# EAGLE board test_parts (EAGLE 6.3)
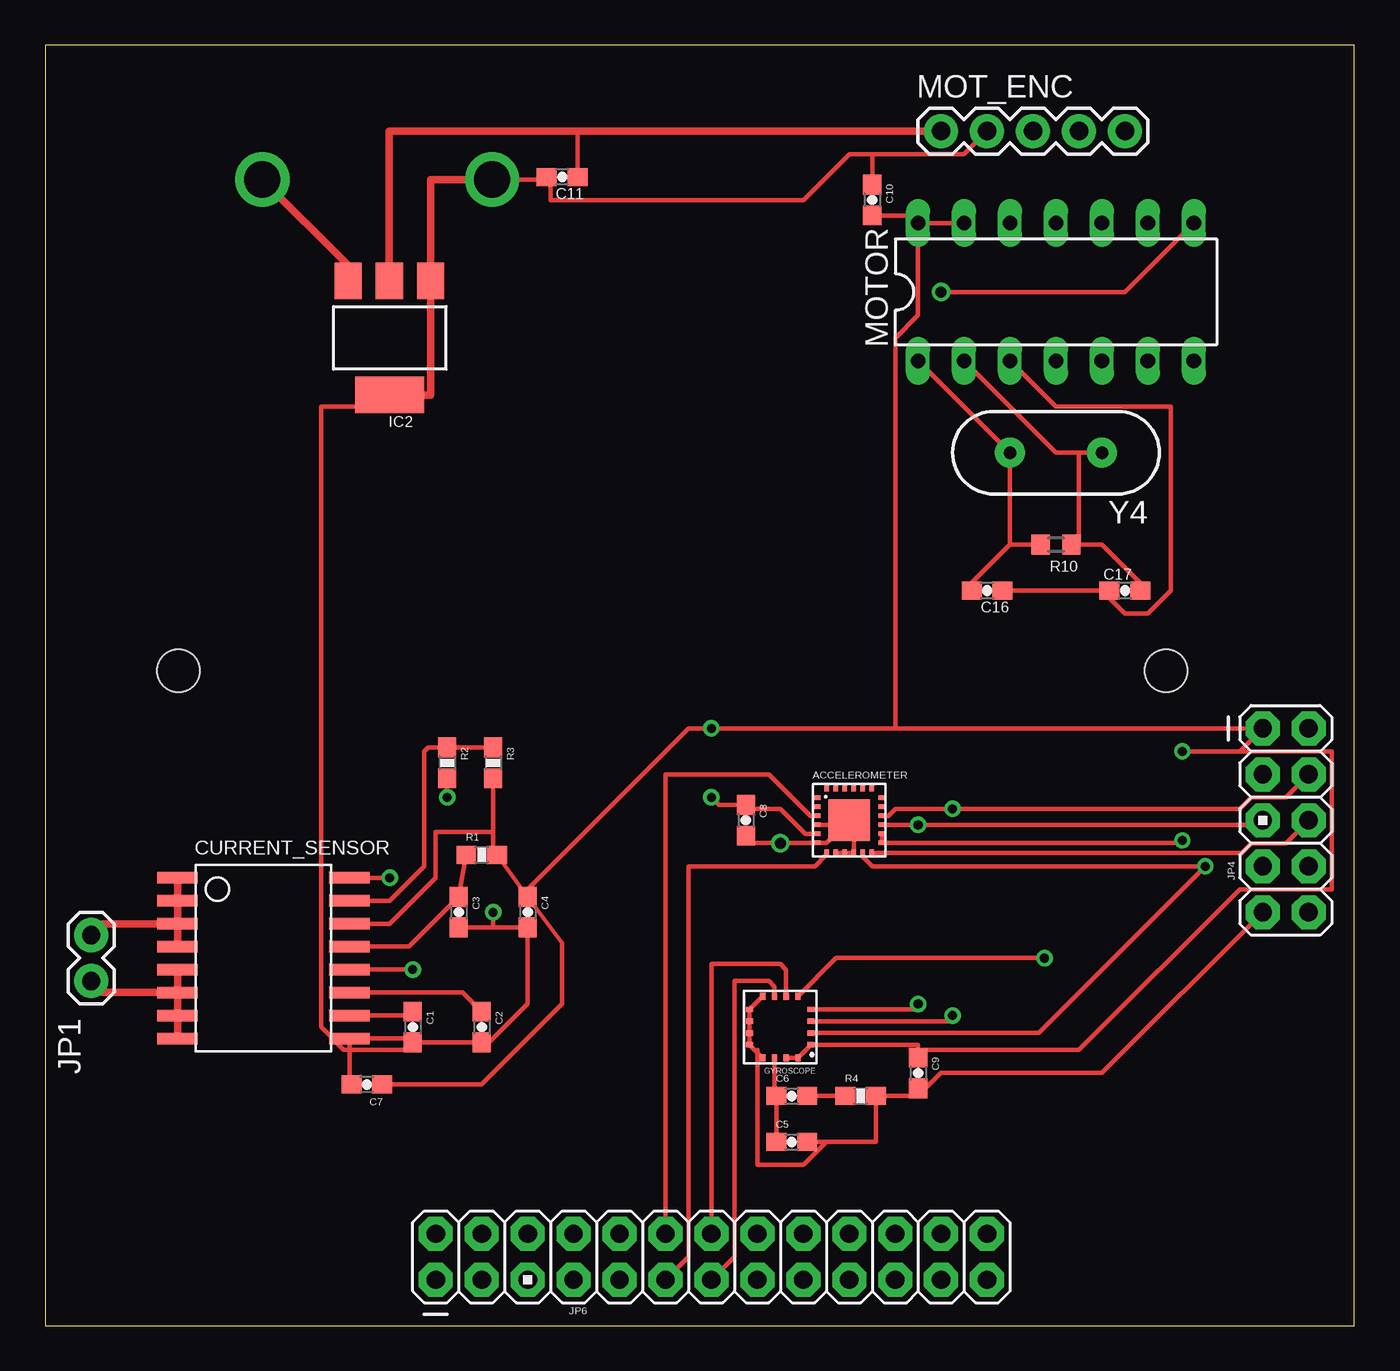
[diagram p0: board, top side]
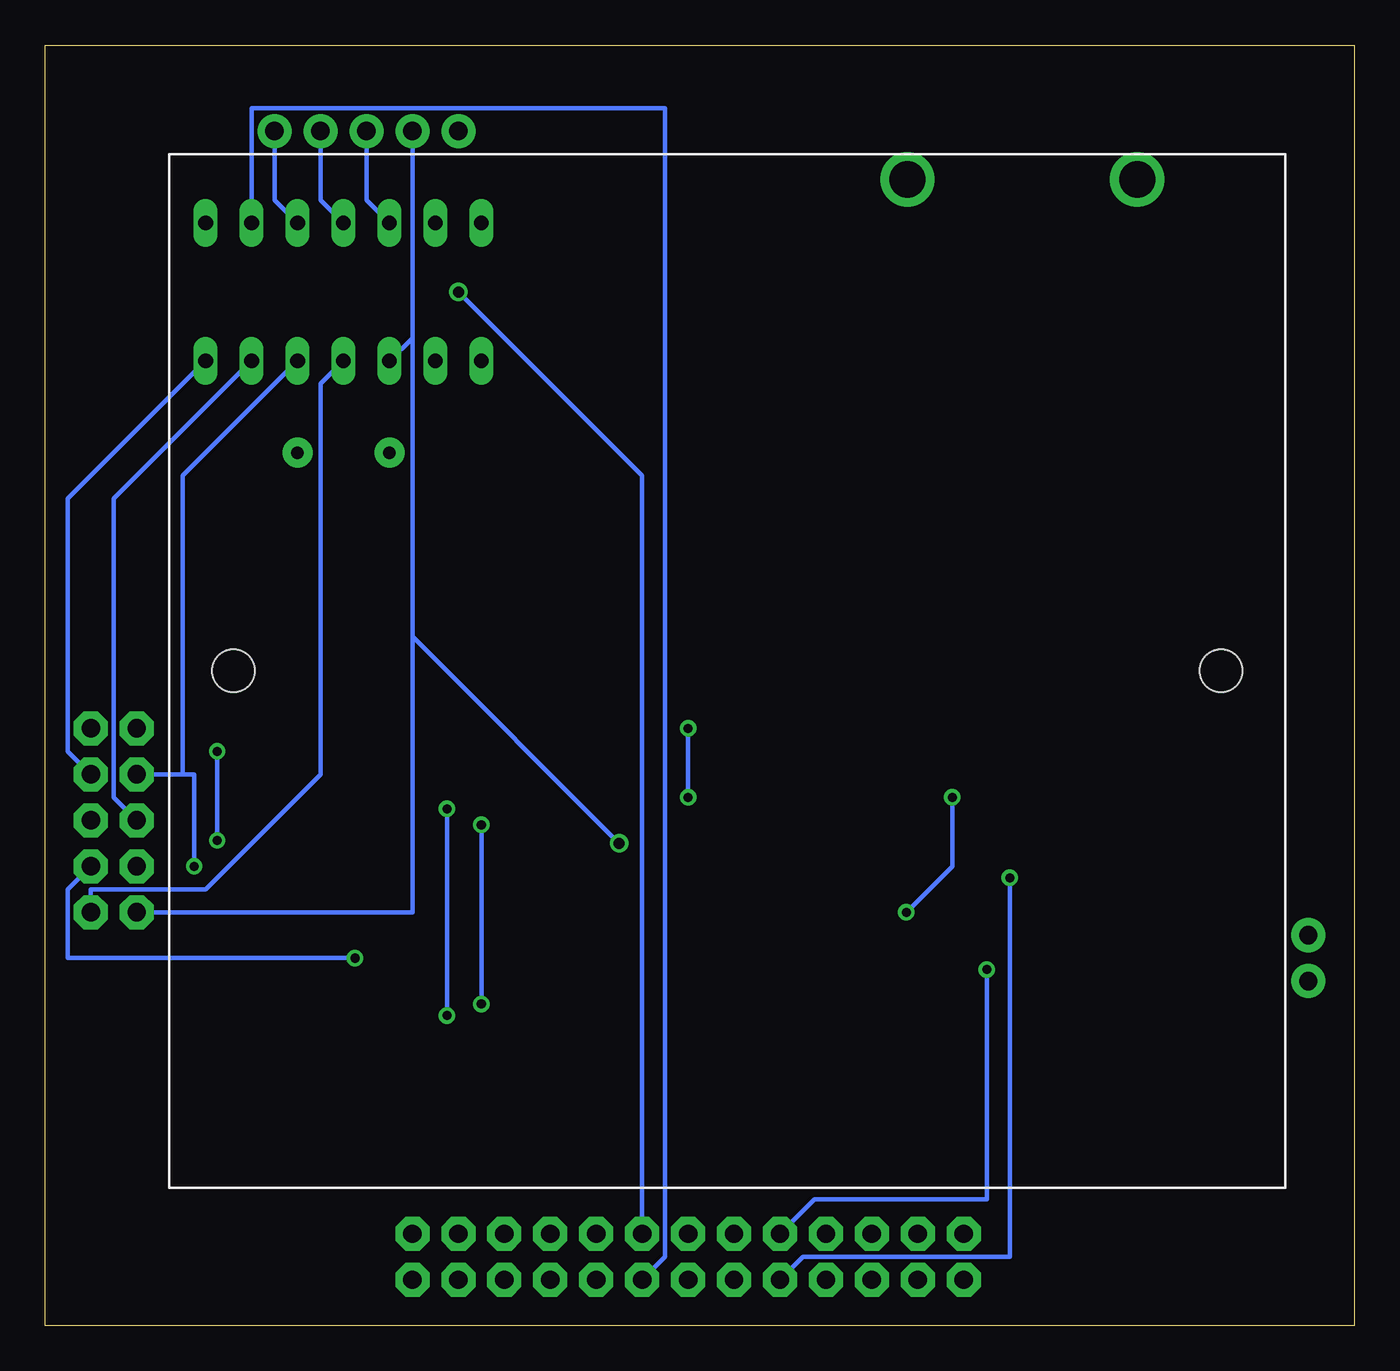
[diagram p1: board, bottom side, seen from below]

Size 72.37 x 70.79 mm. Coordinates in mm from the lower left corner, seen from the top.
Outline: 0,0 72.37,0 72.37,70.79 0,70.79 0,0
Copper layers (1*16): Top 0.035mm / dielectric 1.5mm / Bottom 0.035mm
Design rules "default *": minimum track width 10mil, minimum drill 24mil, track to track 8mil, track to pad 8mil, pad to pad 8mil, via to via 8mil, smd to smd 8mil, copper to edge 40mil, drill to drill 8mil, minimum pad ring 10mil, minimum via ring 8mil, stop-mask expansion 4mil, vias tented up to drill 0mil, thermal gap 10mil

## Footprints (pad centres in the part's own frame; a part is rotated, then mirrored left to right if it is on the bottom)
BH4AA-PC = drill 2: + -1.405,8.19; - -1.405,20.89 | hole 2.36: -28.575,58.16; -28.575,3.56
QFPN-24 = smd 0.4 x 0.25: 1 -1.8,1.25; 2 -1.8,0.75; 3 -1.8,0.25; 4 -1.8,-0.25; 5 -1.8,-0.75; 6 -1.8,-1.25; 13 1.8,-1.25; 14 1.8,-0.75; 15 1.8,-0.25; 16 1.8,0.25; 17 1.8,0.75; 18 1.8,1.25 | smd 0.25 x 0.4: 7 -1.25,-1.8; 8 -0.75,-1.8; 9 -0.25,-1.8; 10 0.25,-1.8; 11 0.75,-1.8; 12 1.25,-1.8; 19 1.25,1.8; 20 0.75,1.8; 21 0.25,1.8; 22 -0.25,1.8; 23 -0.75,1.8; 24 -1.25,1.8 | smd 2.3 x 2.3: HEAT 0,0
0603-CAP = smd 1.1 x 1: 1 -0.85,0; 2 0.85,0
SOICW = smd 0.65 x 2.25: 1 -4.445,-4.75; 2 -3.175,-4.75; 3 -1.905,-4.75; 4 -0.635,-4.75; 5 0.635,-4.75; 6 1.905,-4.75; 7 3.175,-4.75; 8 4.445,-4.75; 9 4.445,4.75; 10 3.175,4.75; 11 1.905,4.75; 12 0.635,4.75; 13 -0.635,4.75; 14 -1.905,4.75; 15 -3.175,4.75; 16 -4.445,4.75
LGA-16 = smd 0.4 x 0.3: 1 -1.7,0.975; 2 -1.7,0.325; 3 -1.7,-0.325; 4 -1.7,-0.975; 9 1.7,-0.975; 10 1.7,-0.325; 11 1.7,0.325; 12 1.7,0.975 | smd 0.3 x 0.4: 5 -0.975,-1.7; 6 -0.325,-1.7; 7 0.325,-1.7; 8 0.975,-1.7; 13 0.975,1.7; 14 0.325,1.7; 15 -0.325,1.7; 16 -0.975,1.7
SOT223 = smd 1.499 x 2.007: 1 -2.261,-3.15; 2 0.025,-3.15; 3 2.311,-3.15 | smd 3.81 x 2.007: 4 0,3.15
1X02 = drill 1.016 pad 1.88: 1 0,0; 2 2.54,0
AVR_ICSP = drill 1.016 pad 1.88 octagon: 1 -1.27,5.08; 2 1.27,5.08; 3 -1.27,2.54; 4 1.27,2.54; 5 -1.27,0; 6 1.27,0; 7 -1.27,-2.54; 8 1.27,-2.54; 9 -1.27,-5.08; 10 1.27,-5.08
AVR_ICSP' = drill 1.016 pad 1.88 octagon: 1 -1.27,5.08; 2 1.27,5.08; 3 -1.27,2.54; 4 1.27,2.54; 5 -1.27,0; 6 1.27,0; 7 -1.27,-2.54; 8 1.27,-2.54; 9 -1.27,-5.08; 10 1.27,-5.08; 11 -1.27,-7.62; 12 1.27,-7.62; 13 -1.27,-10.16; 14 1.27,-10.16; 15 -1.27,-12.7; 16 1.27,-12.7; 17 -1.27,-15.24; 18 1.27,-15.24; 19 -1.27,-17.78; 20 1.27,-17.78; 21 -1.27,-20.32; 22 1.27,-20.32; 23 -1.27,-22.86; 24 1.27,-22.86; 25 -1.27,-25.4; 26 1.27,-25.4
1X05 = drill 1.016 pad 1.88: 1 0,0; 2 2.54,0; 3 5.08,0; 4 7.62,0; 5 10.16,0
DIL14 = drill 0.813 long: 1 -7.62,-3.81; 2 -5.08,-3.81; 3 -2.54,-3.81; 4 0,-3.81; 5 2.54,-3.81; 6 5.08,-3.81; 7 7.62,-3.81; 8 7.62,3.81; 9 5.08,3.81; 10 2.54,3.81; 11 0,3.81; 12 -2.54,3.81; 13 -5.08,3.81; 14 -7.62,3.81
0603-RES = smd 1.1 x 1: 1 -0.85,0; 2 0.85,0
R0603 = smd 1 x 1.1: 1 -0.85,0; 2 0.85,0
HC49US = drill 0.7 pad 1.651: 1 -2.54,0; 2 2.54,0

## Placement (x,y rotation side)
4XAA  [BH4AA-PC]  3.81,64.77 90 bottom
ACCELEROMETER  AIS328DQ  [QFPN-24]  44.45,27.94 0 top
C1  1 nF  [0603-CAP]  20.32,16.51 270 top
C2  DNI  [0603-CAP]  24.13,16.51 270 top
C3  DNI  [0603-CAP]  22.86,22.86 270 top
C4  .1 µF  [0603-CAP]  26.67,22.86 270 top
C5  10 nF  [0603-CAP]  41.27,10.16 0 top
C6  470 nF  [0603-CAP]  41.27,12.7 0 top
C7  0.1 µF  [0603-CAP]  17.78,13.34 180 top
C8  0.1 µF  [0603-CAP]  38.73,27.94 270 top
C9  0.1 µF  [0603-CAP]  48.26,13.97 270 top
C10  0.1 µF  [0603-CAP]  45.72,62.23 270 top
C11  [0603-CAP]  28.57,63.5 180 top
C16  [0603-CAP]  52.07,40.64 180 top
C17  [0603-CAP]  59.69,40.64 0 top
CURRENT_SENSOR  ACS716  [SOICW]  12.06,20.32 270 top
GYROSCOPE  A3G4250D  [LGA-16]  40.64,16.51 180 top
IC2  REG1117  [SOT223]  19.05,54.61 180 top
JP1  [1X02]  2.54,19.05 90 top
JP4  M05X2PTH  [AVR_ICSP]  68.58,27.94 0 top
JP6  M013X2PTH  [AVR_ICSP']  26.67,3.81 90 top
MOT_ENC  [1X05]  49.53,66.04 0 top
MOTOR  LS7366RDIP  [DIL14]  55.88,57.15 0 top
R1  330 Ω  [0603-RES]  24.13,26.04 0 top
R2  DNI  [0603-RES]  22.23,31.11 270 top
R3  DNI  [0603-RES]  24.77,31.11 270 top
R4  10 kΩ  [0603-RES]  45.09,12.7 0 top
R10  1 M  [R0603]  55.88,43.18 180 top
Y4  20 MHz  [HC49US]  55.88,48.26 180 top

## Library data of the parts
4XAA ACCELEROMETER CURRENT_SENSOR GYROSCOPE JP6 MOTOR = lyndon
C1-C10 JP1 JP4 R1-R4 = SparkFun
C11 C16 C17 IC2 = nick_nu32_pic32mx795_v1
MOT_ENC Y4 = andy-monkeybot
R10 = monkeybot

## Nets
+5V: C11.1 IC2.2 MOT_ENC.1
DFLAG: JP6.15 MOTOR.9
DIO1: GYROSCOPE.5 JP4.8
DIO2: JP4.10 MOTOR.4
FAULT_EN: CURRENT_SENSOR.16 JP6.9
GND: 4XAA.- ACCELEROMETER.4 ACCELEROMETER.6 ACCELEROMETER.8 ACCELEROMETER.9 ACCELEROMETER.10 ACCELEROMETER.HEAT C1.2 C2.2 C3.2 C4.2 C5.2 C7.2 C8.2 C9.2 C10.1 C11.2 C16.1 C17.1 CURRENT_SENSOR.9 GYROSCOPE.8 GYROSCOPE.9 GYROSCOPE.10 GYROSCOPE.11 GYROSCOPE.12 GYROSCOPE.13 IC2.1 IC2.4 JP4.9 MOT_ENC.2 MOTOR.3 R2.2 R4.2
INT1: GYROSCOPE.7 JP6.13
INT2: GYROSCOPE.6 JP6.14
INT_1: ACCELEROMETER.7 JP6.11
INT_2: ACCELEROMETER.3 JP6.12
LFLAG: JP6.16 MOTOR.8
N$1: CURRENT_SENSOR.1 CURRENT_SENSOR.2 CURRENT_SENSOR.3 CURRENT_SENSOR.4 JP1.2
N$2: CURRENT_SENSOR.5 CURRENT_SENSOR.6 CURRENT_SENSOR.7 CURRENT_SENSOR.8 JP1.1
N$3: C3.1 CURRENT_SENSOR.13 R1.1
N$4: C1.1 CURRENT_SENSOR.10
N$5: C2.1 CURRENT_SENSOR.11
N$6: 4XAA.+ IC2.3
N$7: CURRENT_SENSOR.15 R2.1 R3.1
N$14: C5.1 C6.1 GYROSCOPE.14
N$15: C6.2 R4.1
N$18: C16.2 MOTOR.1 R10.2 Y4.2
N$19: C17.2 MOTOR.2 R10.1 Y4.1
N$20: MOT_ENC.3 MOTOR.12
N$21: MOT_ENC.4 MOTOR.11
N$22: MOT_ENC.5 MOTOR.10
SPI_CLK: ACCELEROMETER.11 GYROSCOPE.2 JP4.3 MOTOR.5
SPI_DIN: ACCELEROMETER.15 GYROSCOPE.4 JP4.5 MOTOR.6
SPI_DOUT: ACCELEROMETER.16 GYROSCOPE.3 JP4.4 MOTOR.7
SPI_SS: ACCELEROMETER.12 JP4.6
VCC: ACCELEROMETER.5 ACCELEROMETER.13 ACCELEROMETER.14 C4.1 C7.1 C8.1 C9.1 C10.2 CURRENT_SENSOR.14 GYROSCOPE.1 GYROSCOPE.15 GYROSCOPE.16 JP4.1 MOTOR.13 MOTOR.14 R1.2 R3.2
VIOUT: CURRENT_SENSOR.12 JP6.10

## Tracks (layer width: path | path; a pad name or v marks a point on that pad's centre or on a via)
+5V
  Top 0.254: C11.1 29.43,66.04 29.21,66.04
  Top 0.406: IC2.2 19.02,66.04 29.21,66.04 MOT_ENC.1
DFLAG
  Bottom 0.254: MOTOR.9 60.96,67.31 38.1,67.31 38.1,3.81 JP6.15
DIO1  (via drill 0.5)
  Top 0.254: GYROSCOPE.5 43.73,20.32 v55.24,20.32
  Bottom 0.254: v55.24,20.32 71.12,20.32 71.12,24.13 JP4.8
DIO2
  Bottom 0.254: MOTOR.4 57.15,52.07 57.15,30.48 63.5,24.13 69.85,24.13 JP4.10
FAULT_EN  (via drill 0.5)
  Top 0.254: CURRENT_SENSOR.16 v19.05,24.77
  Bottom 0.254: v19.05,24.77 19.05,3.81 30.48,3.81 JP6.9
GND  (via drill 0.5, 0.61)
  Top 0.254: 39.3,15.17 GYROSCOPE.12 GYROSCOPE.11 GYROSCOPE.10 GYROSCOPE.9 GYROSCOPE.8 | 39.3,15.17 GYROSCOPE.13 | ACCELEROMETER.8 ACCELEROMETER.9 ACCELEROMETER.10 44.7,27.3 | 44.7,27.3 44.7,27.69 ACCELEROMETER.HEAT | 43.81,27.3 43.2,26.69 ACCELEROMETER.6 40.64,26.69 | 43.81,27.3 44.7,27.3 | ACCELEROMETER.4 43.81,27.69 43.81,27.3 | 40.64,26.69 39.13,26.69 C8.2 | C1.2 20.11,15.88 CURRENT_SENSOR.9 16.82,13.34 C7.2 | C1.2 C2.2 24.55,15.66 26.67,17.78 C4.2 24.77,22.01 | C3.2 24.77,22.01 | R2.2 v22.23,29.21 | v24.77,22.86 24.77,22.01 | 4XAA.- 27.73,63.37 C11.2 27.94,63.5 27.94,62.23 41.91,62.23 44.45,64.77 45.72,64.77 | 48.26,12.7 R4.2 45.94,10.16 43.18,10.16 | C5.2 43.18,10.16 | 43.18,10.16 41.91,8.89 39.37,8.89 39.37,15.24 39.3,15.17 | 48.26,12.7 49.53,13.97 58.42,13.97 JP4.9 | 48.26,12.7 C9.2 | C1.2 20.32,15.24 16.51,15.24 15.24,16.51 15.24,50.8 19.05,50.8 IC2.4 | 58.42,40.64 C16.1 | 58.42,40.64 59.69,39.37 60.96,39.37 62.23,40.64 62.23,50.8 55.88,50.8 MOTOR.3 | 58.42,40.64 C17.1 | v40.64,26.67 40.64,26.69 | 45.72,64.77 50.8,64.77 MOT_ENC.2 | C10.1 45.72,64.77
  Top 0.406: 4XAA.- 21.31,63.37 IC2.1 21.31,51.46 IC2.4
  Bottom 0.254: v22.23,29.21 22.23,25.4 v24.77,22.86 | 52.07,54.61 MOTOR.3 | MOT_ENC.2 52.07,54.61 | 52.07,38.1 v40.64,26.67 | 52.07,54.61 52.07,38.1 | JP4.9 52.07,22.86 52.07,38.1
INT1
  Top 0.254: GYROSCOPE.7 40.31,18.74 40.01,19.05 38.1,19.05 38.1,3.81 JP6.13
INT2
  Top 0.254: GYROSCOPE.6 40.97,19.68 40.64,20 36.83,20 JP6.14
INT_1
  Top 0.254: ACCELEROMETER.7 43.2,26.05 42.55,25.4 35.56,25.4 35.56,3.81 JP6.11
INT_2
  Top 0.254: JP6.12 34.29,30.48 40.01,30.48 42.3,28.19 ACCELEROMETER.3
LFLAG  (via drill 0.61)
  Top 0.254: MOTOR.8 59.69,57.15 v49.53,57.15
  Bottom 0.254: v49.53,57.15 39.37,46.99 JP6.16
N$1
  Top 0.406: CURRENT_SENSOR.4 CURRENT_SENSOR.3 | CURRENT_SENSOR.3 CURRENT_SENSOR.2 CURRENT_SENSOR.1 | JP1.2 3.17,22.23 CURRENT_SENSOR.3
N$2
  Top 0.406: CURRENT_SENSOR.6 CURRENT_SENSOR.5 | CURRENT_SENSOR.6 CURRENT_SENSOR.7 CURRENT_SENSOR.8 | JP1.1 3.17,18.41 CURRENT_SENSOR.6
N$3
  Top 0.254: CURRENT_SENSOR.13 20.11,20.95 C3.1 R1.1
N$4
  Top 0.254: CURRENT_SENSOR.10 20.11,17.14 C1.1
N$5
  Top 0.254: CURRENT_SENSOR.11 23.07,18.41 C2.1
N$6
  Top 0.406: 4XAA.+ 16.74,58.63 IC2.3
N$7
  Top 0.254: R3.1 R2.1 21.17,31.96 20.95,31.75 20.95,25.4 19.05,23.5 CURRENT_SENSOR.15
N$8  (via drill 0.5)
  other vias: 24.77,22.86
N$9  (via drill 0.5)
  other vias: 36.83,29.21
N$14
  Top 0.254: GYROSCOPE.14 40.31,12.81 | C5.1 C6.1
  Top 0.305: 40.31,12.81 C6.1
N$15
  Top 0.254: C6.2 R4.1
N$18
  Top 0.254: 53.34,43.18 50.8,40.64 C16.2 | R10.2 53.34,43.18 | MOTOR.1 Y4.2 53.34,43.18
N$19
  Top 0.254: 57.15,48.26 57.15,43.18 | Y4.1 57.15,48.26 | 57.15,43.18 58.42,43.18 60.96,40.64 C17.2 | 57.15,43.18 R10.1 | MOTOR.2 55.88,48.26 57.15,48.26
N$20
  Bottom 0.254: MOTOR.12 54.61,62.23 MOT_ENC.3
N$21
  Bottom 0.254: MOTOR.11 57.15,62.23 MOT_ENC.4
N$22
  Bottom 0.254: MOTOR.10 59.69,62.23 MOT_ENC.5
SPI_CLK  (via drill 0.5)
  Top 0.254: ACCELEROMETER.11 45.2,25.92 45.72,25.4 v64.14,25.4 54.92,16.18 GYROSCOPE.2
  Bottom 0.254: v64.14,25.4 64.14,30.48 64.77,30.48 | 64.77,30.48 JP4.3 | MOTOR.5 64.77,46.99 64.77,30.48
SPI_DIN  (via drill 0.5)
  Top 0.254: JP4.5 67.31,27.69 v48.26,27.69 ACCELEROMETER.15 | GYROSCOPE.4 48.26,17.48 v48.26,17.78
  Bottom 0.254: v48.26,17.78 v48.26,27.69 | MOTOR.6 68.58,45.72 68.58,29.21 JP4.5
SPI_DOUT  (via drill 0.5)
  Top 0.254: JP4.4 68.58,29.21 66.67,29.21 66.04,28.57 v50.16,28.57 46.99,28.57 46.6,28.19 ACCELEROMETER.16 | GYROSCOPE.3 50.16,16.84 v50.16,17.14
  Bottom 0.254: v50.16,17.14 v50.16,28.57 | MOTOR.7 71.12,45.72 71.12,31.75 JP4.4
SPI_SS
  Top 0.254: ACCELEROMETER.12 66.14,26.14 66.67,26.67 68.58,26.67 JP4.6
VCC  (via drill 0.5)
  Top 0.254: GYROSCOPE.15 GYROSCOPE.16 GYROSCOPE.1 48.26,15.54 48.26,15.24 | ACCELEROMETER.14 ACCELEROMETER.13 62.84,26.69 v62.87,26.83 | ACCELEROMETER.5 42.02,27.19 40.64,28.57 38.95,28.57 C8.1 37.25,28.79 v36.83,29.21 | C4.1 R1.2 24.77,26.25 24.77,27.3 | R3.2 24.77,27.3 | CURRENT_SENSOR.14 19.05,22.23 21.59,24.77 21.59,27.3 24.77,27.3 | C7.1 24.13,13.34 28.57,17.78 28.57,21.17 C4.1 | 46.99,33.02 JP4.1 66.04,31.75 | 46.99,33.02 v36.83,33.02 35.56,33.02 26.67,24.13 C4.1 | 66.04,31.75 v62.87,31.75 | MOTOR.13 MOTOR.14 | 48.26,15.24 57.15,15.24 66.04,24.13 71.12,24.13 71.12,31.75 66.04,31.75 | 48.26,15.24 C9.1 | MOTOR.14 48.26,55.88 46.99,54.61 46.99,33.02 | MOTOR.14 47.84,61.38 C10.2
  Bottom 0.254: v36.83,33.02 v36.83,29.21 | v62.87,31.75 v62.87,26.83
VIOUT  (via drill 0.5)
  Top 0.254: CURRENT_SENSOR.12 v20.32,19.68
  Bottom 0.254: v20.32,19.68 20.32,6.99 29.84,6.99 JP6.10